# EAGLE board manual_shieldMine1 (EAGLE 9.2.0)
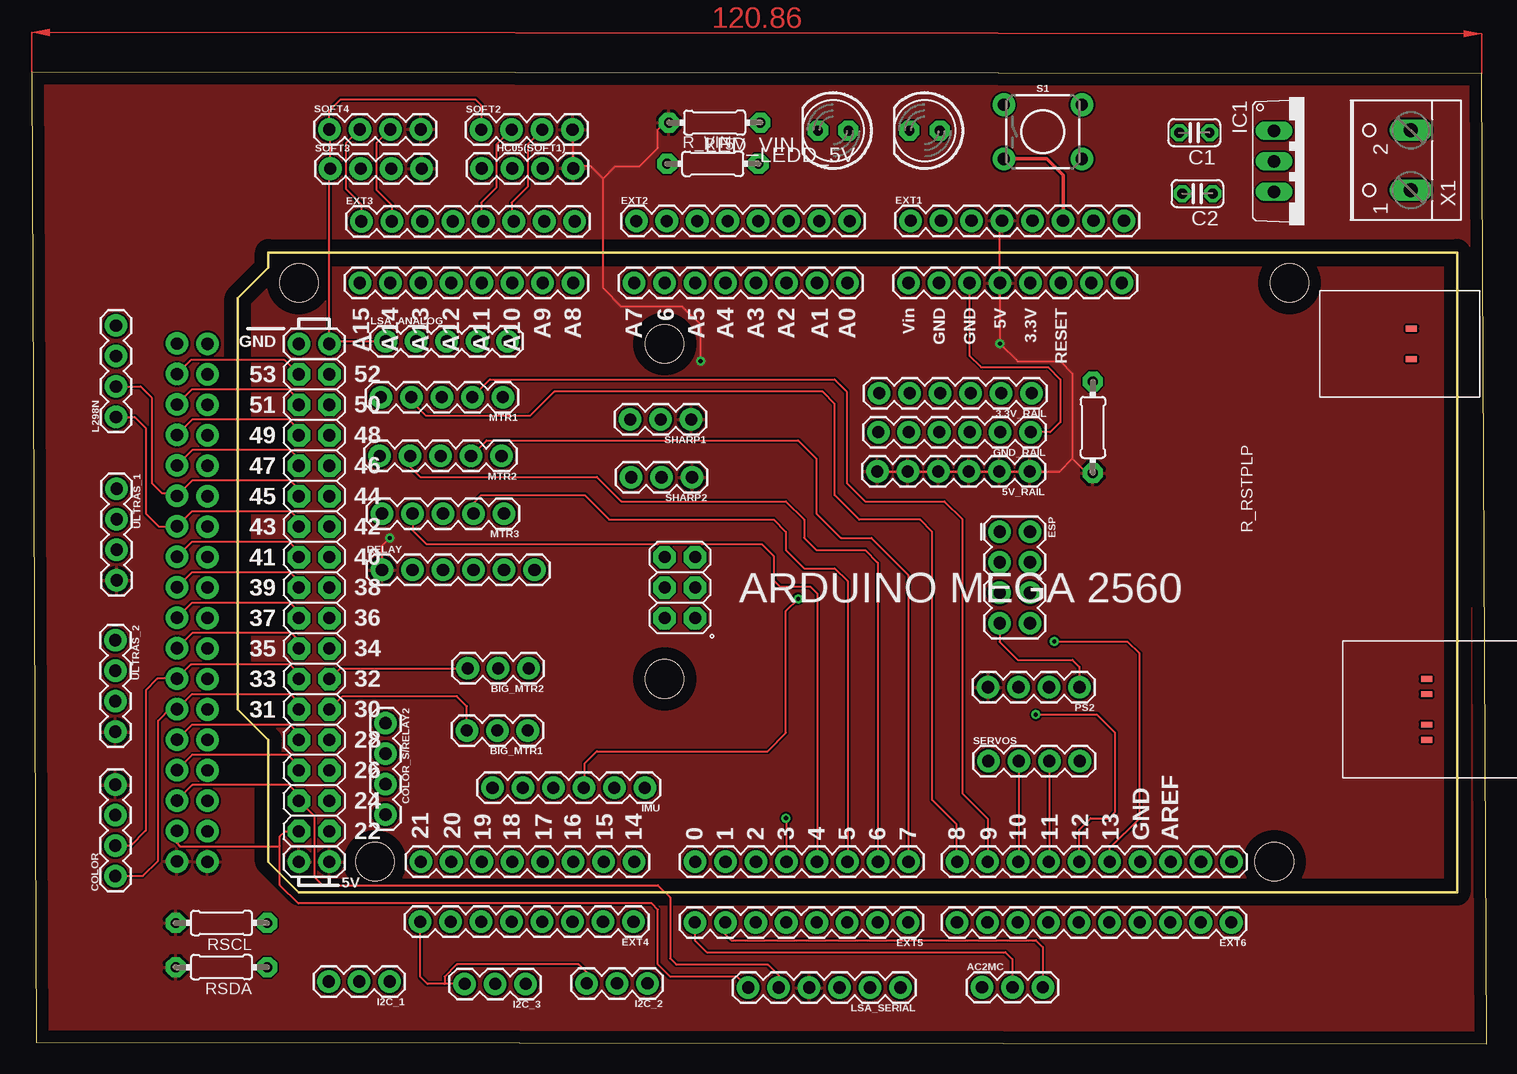
[diagram p0: board, top side]
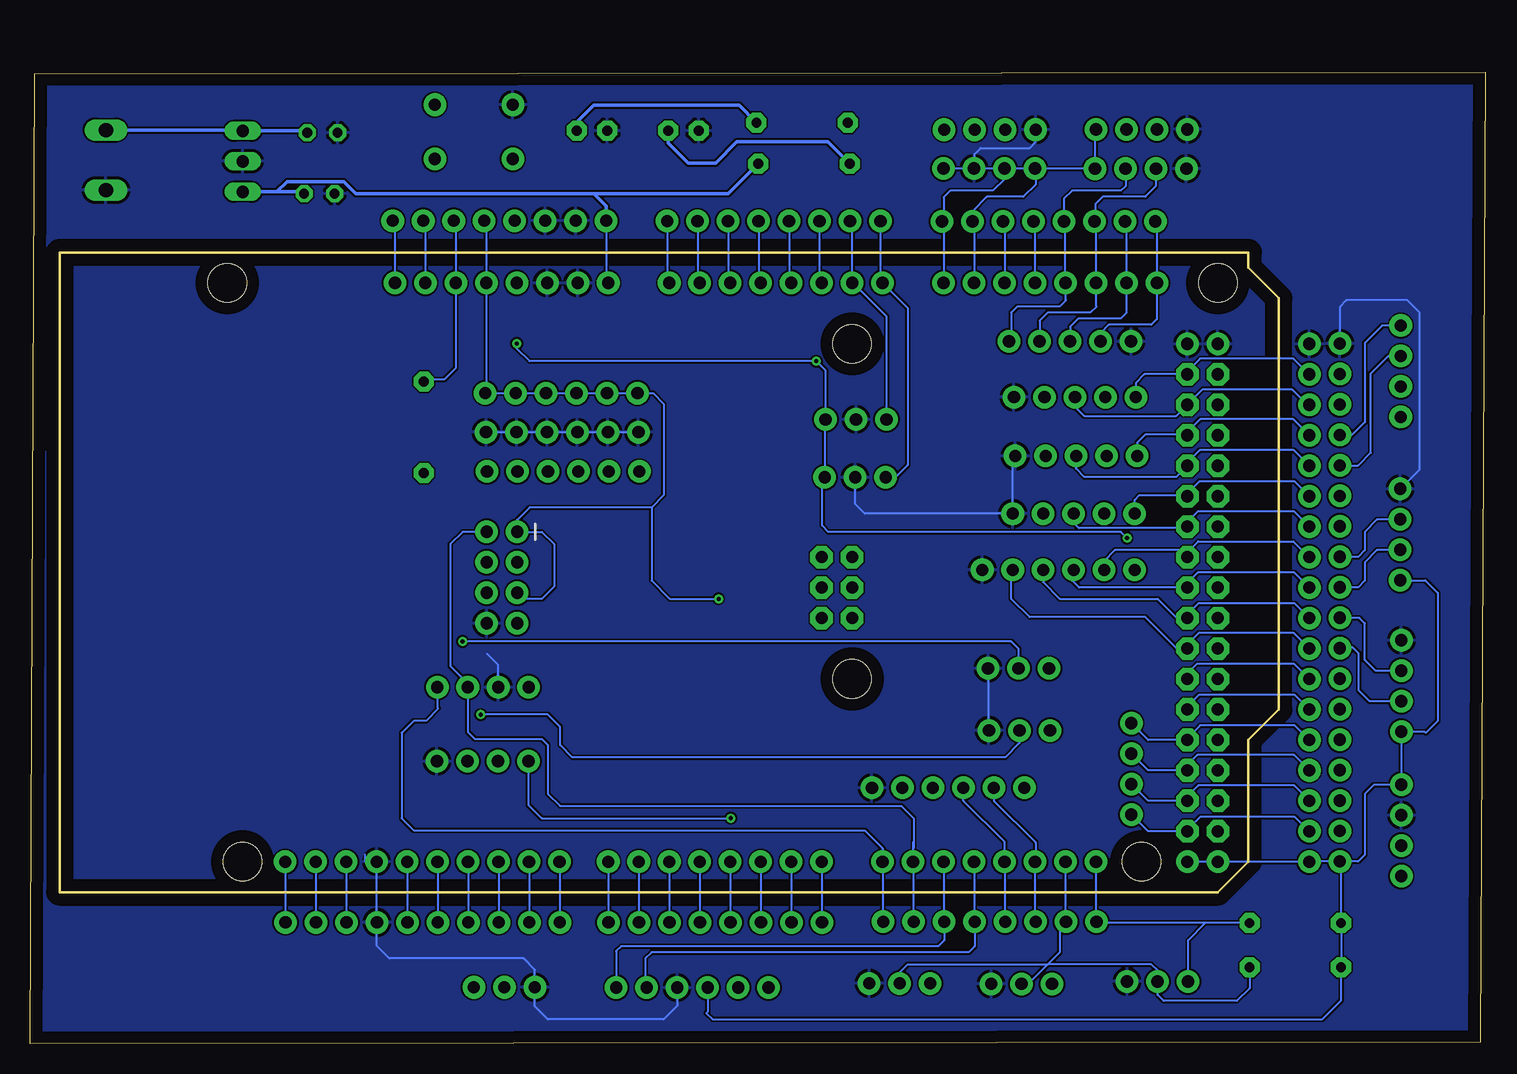
[diagram p1: board, bottom side, seen from below]

Size 121.27 x 80.98 mm. Coordinates in mm from the lower left corner, seen from the top.
Outline: 0.41,0.1 121.27,0 120.86,80.87 0,80.97 0.41,0.1
Copper layers (1*16): Top 0.035mm / dielectric 1.5mm / Bottom 0.035mm
Design rules "default": minimum track width 6mil, minimum drill 0.35mm, track to track 6mil, track to pad 6mil, pad to pad 6mil, via to via 6mil, smd to smd 6mil, copper to edge 40mil, drill to drill 6mil, minimum pad ring 10mil, minimum via ring 8mil, stop-mask expansion 4mil, vias tented up to drill 0mil, thermal gap 10mil

## Footprints (pad centres in the part's own frame; a part is rotated, then mirrored left to right if it is on the bottom)
1X06 = drill 1.016 pad 1.88: 1 0,0; 2 2.54,0; 3 5.08,0; 4 7.62,0; 5 10.16,0; 6 12.7,0
1X03 = drill 1.016 pad 1.88: 1 0,0; 2 2.54,0; 3 5.08,0
C025-024X044 = drill 0.813 pad 1.422 octagon: 1 -1.27,0; 2 1.27,0
1X04 = drill 1.016 pad 1.88: 1 0,0; 2 2.54,0; 3 5.08,0; 4 7.62,0
2X4 = drill 1.016 pad 1.88: 1 -3.81,-1.27; 2 -3.81,1.27; 3 -1.27,-1.27; 4 -1.27,1.27; 5 1.27,-1.27; 6 1.27,1.27; 7 3.81,-1.27; 8 3.81,1.27
1X08 = drill 1.016 pad 1.88: 1 0,0; 2 2.54,0; 3 5.08,0; 4 7.62,0; 5 10.16,0; 6 12.7,0; 7 15.24,0; 8 17.78,0
1X10 = drill 1.016 pad 1.88: 1 0,0; 2 2.54,0; 3 5.08,0; 4 7.62,0; 5 10.16,0; 6 12.7,0; 7 15.24,0; 8 17.78,0; 9 20.32,0; 10 22.86,0
1X18_NO_SILK = drill 1.016 pad 1.88: 1 0,0; 2 2.54,0; 3 5.08,0; 4 7.62,0; 5 10.16,0; 6 12.7,0; 7 15.24,0; 8 17.78,0; 9 20.32,0; 10 22.86,0; 11 25.4,0; 12 27.94,0; 13 30.48,0; 14 33.02,0; 15 35.56,0; 16 38.1,0; 17 40.64,0; 18 43.18,0
TO220V = drill 1.016 long: 1 -2.54,-2.54; 2 0,-2.54; 3 2.54,-2.54
LED5MM = drill 0.813 pad 1.676 octagon: A -1.27,0; K 1.27,0
1X05 = drill 1.016 pad 1.88: 1 0,0; 2 2.54,0; 3 5.08,0; 4 7.62,0; 5 10.16,0
ARDUINO_MEGA2560 = drill 1.016 pad 1.88: 0 63.5,50.8; 1 60.96,50.8; 2 58.42,50.8; 3 55.88,50.8; 3.3V 35.56,2.54; 4 53.34,50.8; 5 50.8,50.8; 5V 38.1,2.54; 5V. 93.98,50.8; 5V.. 96.52,50.8; 6 48.26,50.8; 7 45.72,50.8; 8 41.656,50.8; 9 39.116,50.8; 10 36.576,50.8; 11 34.036,50.8; 12 31.496,50.8; 13 28.956,50.8; 14 68.58,50.8; 15 71.12,50.8; 16 73.66,50.8; 17 76.2,50.8; 18 78.74,50.8; 19 81.28,50.8; 20 83.82,50.8; 21 86.36,50.8; A0 50.8,2.54; A1 53.34,2.54; A2 55.88,2.54; A3 58.42,2.54; A4 60.96,2.54; A5 63.5,2.54; A6 66.04,2.54; A7 68.58,2.54; A8 73.66,2.54; A9 76.2,2.54; A10 78.74,2.54; A11 81.28,2.54; A12 83.82,2.54; A13 86.36,2.54; A14 88.9,2.54; A15 91.44,2.54; AREF 23.876,50.8; GND 26.416,50.8; GND. 43.18,2.54; GND.. 40.64,2.54; GND... 93.98,7.62; GND.... 96.52,7.62; I/OREF 30.48,2.54; N/C 27.94,2.54; RESET 33.02,2.54; SCL1 18.796,50.8; SDA1 21.336,50.8; VIN 45.72,2.54 | drill 1.016 pad 1.88 octagon: 22 93.98,48.26; 23 96.52,48.26; 24 93.98,45.72; 25 96.52,45.72; 26 93.98,43.18; 27 96.52,43.18; 28 93.98,40.64; 29 96.52,40.64; 30 93.98,38.1; 31 96.52,38.1; 32 93.98,35.56; 33 96.52,35.56; 34 93.98,33.02; 35 96.52,33.02; 36 93.98,30.48; 37 96.52,30.48; 38 93.98,27.94; 39 96.52,27.94; 40 93.98,25.4; 41 96.52,25.4; 42 93.98,22.86; 43 96.52,22.86; 44 93.98,20.32; 45 96.52,20.32; 46 93.98,17.78; 47 96.52,17.78; 48 93.98,15.24; 49 96.52,15.24; 50 93.98,12.7; 51 96.52,12.7; 52 93.98,10.16; 53 96.52,10.16; +5V_ 66.04,30.48; GND__ 66.04,25.4; MISO 63.5,30.48; MOSI 66.04,27.94; RESET. 63.5,25.4; SCK 63.5,27.94 | smd 1.016 x 0.508: <PWR>+V 3.81,8.89; <PWR>-V 3.81,6.35; <USB>+V 2.54,40.64; <USB>D+ 2.54,39.37; <USB>D- 2.54,36.83; <USB>GND 2.54,35.56 | hole 3.2: 15.24,50.8; 13.97,2.54; 66.04,35.56; 66.04,7.62; 90.17,50.8; 96.52,2.54
0204/7 = drill 0.813 pad 1.676 octagon: 1 -3.81,0; 2 3.81,0
TACTILE_SWITCH_PTH_6.0MM = drill 1.016 pad 1.88: 1 -3.251,2.261; 2 3.251,2.261; 3 -3.251,-2.261; 4 3.251,-2.261
W237-102 = drill 1.194 long: 1 -2.5,-1.27; 2 2.5,-1.27

## Placement (x,y rotation side)
3.3V_RAIL  [1X06]  83.34,54.23 180 top
5V_RAIL  [1X06]  83.19,47.7 180 top
AC2MC  455-1750-1-ND  [1X03]  79.2,4.7 0 top
BIG_MTR1  455-1750-1-ND  [1X03]  41.35,26.11 180 top
BIG_MTR2  455-1750-1-ND  [1X03]  41.43,31.29 180 top
C1  [C025-024X044]  96.9,75.95 180 top
C2  [C025-024X044]  97.16,70.87 180 top
COLOR  [1X04]  6.98,13.97 90 top
COLOR_S/RELAY2  [1X04]  29.49,26.72 270 top
ESP  [2X4]  81.94,38.86 270 top
EXT1  [1X08]  73.25,68.61 0 top
EXT2  [1X08]  50.39,68.58 0 top
EXT3  [1X08]  27.48,68.55 0 top
EXT4  [1X08]  50.16,10.16 180 top
EXT5  [1X08]  73.05,10.11 180 top
EXT6  [1X10]  99.97,10.11 180 top
EXT_B1  [1X18_NO_SILK]  14.66,58.34 270 bottom
EXT_B2  [1X18_NO_SILK]  12.12,15.19 90 bottom
GND_RAIL  [1X06]  83.26,50.98 180 top
HC05(SOFT1)  [1X04]  37.52,72.97 0 top
I2C_1  455-1750-1-ND  [1X03]  29.84,5.18 180 top
I2C_2  455-1750-1-ND  [1X03]  51.33,5.03 180 top
I2C_3  455-1750-1-ND  [1X03]  41.17,4.98 180 top
IC1  7812TV  [TO220V]  106.07,73.56 270 top
IMU  [1X06]  51.1,21.34 180 top
L298N  [1X04]  7.04,52.25 90 top
LED_VIN  [LED5MM]  66.8,76.12 180 top
LEDD_5V  [LED5MM]  74.42,76.12 180 top
LSA_ANALOG  [1X05]  29.51,58.55 0 top
LSA_SERIAL  [1X06]  72.42,4.67 180 top
MTR1  [1X05]  39.27,53.9 180 top
MTR2  [1X05]  39.17,49 180 top
MTR3  [1X05]  39.37,44.2 180 top
PCB1  ARDUINO_MEGA2560  [ARDUINO_MEGA2560]  118.8,65.96 180 top
PS2  [1X04]  87.33,29.72 180 top
R_5V  [0204/7]  56.92,76.78 180 top
R_RSTPLP  [0204/7]  88.44,51.38 270 top
R_VIN  [0204/7]  56.77,73.36 0 top
RELAY  [1X06]  29.21,39.5 0 top
RSCL  [0204/7]  15.82,10.06 180 top
RSDA  [0204/7]  15.82,6.38 180 top
S1  MOMENTARY-SWITCH-SPST-PTH-6.0MM  [TACTILE_SWITCH_PTH_6.0MM]  84.28,76.02 0 top
SERVOS  [1X04]  79.73,23.55 0 top
SHARP1  455-1750-1-ND  [1X03]  54.97,52.04 180 top
SHARP2  455-1750-1-ND  [1X03]  55.04,47.22 180 top
SOFT2  [1X04]  37.46,76.2 0 top
SOFT3  [1X04]  24.89,72.95 0 top
SOFT4  [1X04]  24.82,76.23 0 top
ULTRAS_1  [1X04]  7.09,46.25 270 top
ULTRAS_2  [1X04]  6.98,33.63 270 top
X1  [W237-102]  113.66,73.66 90 top

## Library data of the parts
3.3V_RAIL 5V_RAIL GND_RAIL IMU LSA_SERIAL RELAY = SparkFun-Connectors; PROD_ID: CONN-08437
AC2MC BIG_MTR1 BIG_MTR2 I2C_1-I2C_3 SHARP1 SHARP2 = SparkFun-Connectors; PROD_ID: XXX-00000
C1 C2 LED_VIN LEDD_5V R_5V R_RSTPLP R_VIN RSCL RSDA = adafruit
COLOR COLOR_S/RELAY2 HC05(SOFT1) L298N PS2 SERVOS SOFT2-SOFT4 ULTRAS_1 ULTRAS_2 = SparkFun-Connectors; PROD_ID: CONN-09696
ESP EXT_B1 EXT_B2 LSA_ANALOG MTR1-MTR3 = SparkFun-Connectors
EXT1-EXT5 = SparkFun-Connectors; PROD_ID: CONN-08438
EXT6 = SparkFun-Connectors; PROD_ID: CONN-11563
IC1 = linear
PCB1 = E14_Arduino_revC
S1 = SparkFun-Switches; PROD_ID: SWCH-08441; SF_SKU: COM-00097
X1 = con-wago-500; MPN: 237-102; OC_FARNELL: unknown; OC_NEWARK: 70K9898

## Nets
2: EXT5.6 PCB1.2
3: EXT5.5 PCB1.3 SERVOS.1
3.3V: 3.3V_RAIL.1 3.3V_RAIL.2 3.3V_RAIL.3 3.3V_RAIL.4 3.3V_RAIL.5 3.3V_RAIL.6 ESP.1 ESP.5 EXT1.5 IMU.3 PCB1.3.3V
4: EXT5.4 MTR3.4 PCB1.4
5: EXT5.3 MTR3.2 PCB1.5
5V: 5V_RAIL.1 5V_RAIL.2 5V_RAIL.3 5V_RAIL.4 5V_RAIL.5 5V_RAIL.6 COLOR.4 EXT1.4 EXT_B1.18 EXT_B2.1 HC05(SOFT1).4 LSA_SERIAL.4 PCB1.5V PCB1.5V. PCB1.5V.. PS2.4 R_5V.2 R_RSTPLP.2 RELAY.1 RSCL.2 RSDA.2 SHARP1.1 SHARP2.1 SOFT2.4 SOFT3.4 SOFT4.4 ULTRAS_1.4 ULTRAS_2.4
6: EXT5.2 MTR2.4 PCB1.6
7: EXT5.1 MTR2.2 PCB1.7
8: EXT6.10 MTR1.4 PCB1.8
9: EXT6.9 MTR1.2 PCB1.9
10: EXT6.8 PCB1.10 SERVOS.2
11: EXT6.7 PCB1.11 SERVOS.3
12: BIG_MTR1.2 EXT6.6 PCB1.12
12V: C2.1 EXT1.1 IC1.3 PCB1.VIN R_VIN.2
13: BIG_MTR2.2 EXT6.5 PCB1.13
22: COLOR_S/RELAY2.4 EXT_B1.17 PCB1.22
23: EXT_B2.2 LSA_SERIAL.6 PCB1.23
24: COLOR_S/RELAY2.3 EXT_B1.16 PCB1.24
25: EXT_B2.3 LSA_SERIAL.5 PCB1.25
26: COLOR_S/RELAY2.2 EXT_B1.15 PCB1.26
27: EXT_B2.4 PCB1.27
28: COLOR_S/RELAY2.1 EXT_B1.14 PCB1.28
29: EXT_B2.5 PCB1.29
30: BIG_MTR1.3 EXT_B1.13 PCB1.30
31: COLOR.1 EXT_B2.6 PCB1.31
32: BIG_MTR2.3 EXT_B1.12 PCB1.32
33: COLOR.2 EXT_B2.7 PCB1.33
34: EXT_B1.11 PCB1.34 RELAY.5
35: EXT_B2.8 PCB1.35 ULTRAS_2.3
36: EXT_B1.10 PCB1.36 RELAY.4
37: EXT_B2.9 PCB1.37 ULTRAS_2.2
38: EXT_B1.9 PCB1.38 RELAY.3
39: EXT_B2.10 PCB1.39 ULTRAS_1.3
40: EXT_B1.8 PCB1.40 RELAY.2
41: EXT_B2.11 PCB1.41 ULTRAS_1.2
42: EXT_B1.7 MTR3.3 PCB1.42
43: EXT_B2.12 L298N.1 PCB1.43
44: EXT_B1.6 MTR3.5 PCB1.44
45: EXT_B2.13 L298N.2 PCB1.45
46: EXT_B1.5 MTR2.3 PCB1.46
47: EXT_B2.14 L298N.3 PCB1.47
48: EXT_B1.4 MTR2.5 PCB1.48
49: EXT_B2.15 L298N.4 PCB1.49
50: EXT_B1.3 MTR1.3 PCB1.50
51: EXT_B2.16 PCB1.51
52: EXT_B1.2 MTR1.5 PCB1.52
53: EXT_B2.17 PCB1.53
A0: EXT2.8 PCB1.A0
A1: EXT2.7 PCB1.A1
A2: EXT2.6 PCB1.A2
A3: EXT2.5 PCB1.A3
A4: EXT2.4 PCB1.A4
A5: EXT2.3 PCB1.A5
A6: EXT2.2 PCB1.A6 SHARP1.3
A7: EXT2.1 PCB1.A7 SHARP2.3
A8: EXT3.8 HC05(SOFT1).2 PCB1.A8
A9: EXT3.7 HC05(SOFT1).1 PCB1.A9
A10: EXT3.6 PCB1.A10 SOFT2.3
A11: EXT3.5 PCB1.A11 SOFT2.2
A12: EXT3.4 LSA_ANALOG.5 PCB1.A12 SOFT3.3
A13: EXT3.3 LSA_ANALOG.4 PCB1.A13 SOFT3.2
A14: EXT3.2 LSA_ANALOG.3 PCB1.A14 SOFT4.3
A15: EXT3.1 LSA_ANALOG.2 PCB1.A15 SOFT4.2
AREF: EXT6.3 PCB1.AREF
GND: AC2MC.1 BIG_MTR1.1 BIG_MTR2.1 C1.2 C2.2 COLOR.3 ESP.8 EXT1.2 EXT1.3 EXT6.4 EXT_B1.1 EXT_B2.18 GND_RAIL.1 GND_RAIL.2 GND_RAIL.3 GND_RAIL.4 GND_RAIL.5 GND_RAIL.6 HC05(SOFT1).3 I2C_1.1 I2C_2.1 I2C_3.1 IC1.2 IMU.1 LED_VIN.K LEDD_5V.K LSA_ANALOG.1 LSA_SERIAL.3 MTR1.1 MTR2.1 MTR3.1 PCB1.GND PCB1.GND. PCB1.GND.. PCB1.GND... PCB1.GND.... PS2.3 RELAY.6 S1.1 SERVOS.4 SHARP1.2 SHARP2.2 SOFT2.1 SOFT3.1 SOFT4.1 ULTRAS_1.1 ULTRAS_2.1 X1.1
N$4: LED_VIN.A R_VIN.1
N$5: LEDD_5V.A R_5V.1
N$55: EXT1.6 PCB1.RESET R_RSTPLP.1 S1.3
N$61: EXT1.7 PCB1.I/OREF
N$62: EXT1.8 PCB1.N/C
RX0: AC2MC.2 EXT5.8 PCB1.0
RX1: EXT4.6 IMU.5 PCB1.19
RX2: EXT4.4 LSA_SERIAL.2 PCB1.17
RX3: ESP.2 EXT4.2 PCB1.15 PS2.2
SCL: EXT4.8 I2C_1.3 I2C_2.3 I2C_3.3 PCB1.21 RSCL.1
SCL1: EXT6.1 PCB1.SCL1
SDA: EXT4.7 I2C_1.2 I2C_2.2 I2C_3.2 PCB1.20 RSDA.1
SDA1: EXT6.2 PCB1.SDA1
TX0: AC2MC.3 EXT5.7 PCB1.1
TX1: EXT4.5 IMU.4 PCB1.18
TX2: EXT4.3 LSA_SERIAL.1 PCB1.16
TX3: ESP.7 EXT4.1 PCB1.14 PS2.1
V_SUP: C1.1 IC1.1 X1.2

## Tracks (layer width: path | path; a pad name or v marks a point on that pad's centre or on a via)
2
  Bottom 0.152: PCB1.2 60.38,10.13 EXT5.6
3  (via drill 0.35)
  Top 0.152: PCB1.3 62.92,18.74 v62.87,18.8
  Bottom 0.152: PCB1.3 62.92,10.13 EXT5.5 | SERVOS.1 79.73,19.91 78.61,18.8 v62.87,18.8
3.3V  (via drill 0.35)
  Top 0.152: v63.88,37.08 62.87,36.07 62.87,25.91 61.34,24.38 47.12,24.38 46.1,23.37 46.1,21.41 IMU.3
  Bottom 0.152: EXT1.5 83.24,68.43 PCB1.3.3V 83.24,54.33 3.3V_RAIL.1 3.3V_RAIL.2 3.3V_RAIL.3 3.3V_RAIL.4 3.3V_RAIL.5 3.3V_RAIL.6 69.34,54.23 68.45,53.34 68.45,45.72 69.47,44.7 | 69.47,44.7 79.63,44.7 80.67,43.66 ESP.1 78.61,42.67 77.6,41.66 77.6,38.1 78.61,37.08 80.65,37.08 80.67,37.11 ESP.5 | 69.47,44.7 69.47,38.61 67.94,37.08 v63.88,37.08
4
  Top 0.152: MTR3.4 31.75,42.8 32.89,41.66 52.2,41.66 52.27,41.73 55.78,41.73 55.86,41.66 60.83,41.66 61.85,40.64 61.85,38.61 62.36,38.1 64.9,38.1 65.46,37.54 PCB1.4
  Bottom 0.152: PCB1.4 65.46,10.13 EXT5.4
5
  Top 0.152: MTR3.2 36.83,45.09 37.46,45.72 46.1,45.72 48.13,43.69 61.85,43.69 62.87,42.67 62.87,41.15 64.39,39.62 66.93,39.62 68,38.56 PCB1.5
  Bottom 0.152: PCB1.5 68,10.13 EXT5.3
5V  (via drill 0.35)
  Top 0.152: 81.15,69.09 80.7,68.63 PCB1.5V v80.7,58.37 82.17,56.9 85.72,56.9 86.74,55.88 86.74,48.77 | 86.74,48.77 87.94,47.57 R_RSTPLP.2 | 86.74,48.77 85.67,47.7 5V_RAIL.1 5V_RAIL.6 | v55.75,56.9 55.75,59.94 54.23,61.47 49.15,61.47 47.62,62.99 47.62,72.14 | 47.62,72.14 46.61,73.15 45.31,73.15 HC05(SOFT1).4 45.14,76.15 SOFT2.4 | 47.62,72.14 48.64,73.15 50.67,73.15 52.2,74.68 52.2,76.2 52.78,76.78 R_5V.2 | RELAY.1 29.21,41.53 v29.84,42.16
  Bottom 0.152: 55.04,47.75 55.04,51.97 SHARP1.1 54.97,56.11 v55.75,56.9 79.63,56.9 80.7,57.96 v80.7,58.37 | 55.04,47.75 SHARP2.1 | HC05(SOFT1).4 45.11,72.95 SOFT3.4 32.51,76.15 SOFT4.4 | EXT_B2.1 14.63,15.19 EXT_B1.18 PCB1.5V.. PCB1.5V. | EXT_B2.1 10.59,15.19 10.03,15.75 10.03,20.83 9.27,21.59 COLOR.4 ULTRAS_2.4 5.05,26.01 4.95,25.91 3.94,26.92 3.94,37.59 4.98,38.63 ULTRAS_1.4 | v29.84,42.16 30.35,42.67 54.74,42.67 55.24,43.18 55.24,47.55 55.04,47.75 | LSA_SERIAL.4 64.79,2.64 64.9,2.54 64.39,2.03 13.59,2.03 12.01,3.61 RSDA.2 RSCL.2 12.01,15.09 EXT_B2.1
  pour Top: 128.91,27.94 128.91,83.82 -8.26,83.82 -8.26,-2.54 128.91,-2.54
6
  Top 0.152: MTR2.4 31.55,48.08 32.38,47.24 47.12,47.24 49.15,45.21 62.87,45.21 64.39,43.69 64.39,42.16 65.41,41.15 69.47,41.15 70.54,40.08 PCB1.6
  Bottom 0.152: PCB1.6 70.54,10.13 EXT5.2
7
  Top 0.152: MTR2.2 37.92,50.29 63.88,50.29 65.41,48.77 65.41,44.2 67.44,42.16 69.98,42.16 73.08,39.06 PCB1.7
  Bottom 0.152: EXT5.1 73.05,15.14 PCB1.7
8
  Top 0.152: PCB1.8 77.09,15.21 77.09,18.29 75.06,20.32 75.06,42.67 74.04,43.69 68.96,43.69 66.93,45.72 66.93,53.34 65.91,54.36 43.56,54.36 41.53,52.32 32.89,52.32 31.65,53.57 MTR1.4
  Bottom 0.152: PCB1.8 77.14,10.13 EXT6.10
9
  Top 0.152: MTR1.2 38.2,55.37 66.93,55.37 67.94,54.36 67.94,46.74 69.47,45.21 76.07,45.21 77.6,43.69 77.6,20.83 79.68,18.74 PCB1.9
  Bottom 0.152: PCB1.9 79.68,10.13 EXT6.9
10
  Top 0.152: SERVOS.2 82.27,15.21 PCB1.10
  Bottom 0.152: PCB1.10 82.22,10.13 EXT6.8
11
  Top 0.152: SERVOS.3 84.81,15.21 PCB1.11
  Bottom 0.152: PCB1.11 84.76,10.13 EXT6.7
12  (via drill 0.35)
  Top 0.152: v83.69,27.43 88.77,27.43 90.3,25.91 90.3,19.3 89.79,18.8 88.27,18.8 87.3,17.83 PCB1.12
  Bottom 0.152: PCB1.12 87.3,10.13 EXT6.6 | BIG_MTR1.2 38.81,25.07 40.01,23.88 76.07,23.88 77.09,24.89 77.09,26.42 78.11,27.43 v83.69,27.43
12V
  Bottom 0.152: EXT1.1 73.25,63.6 PCB1.VIN
  Bottom 0.305: IC1.3 100.71,71.02 | 100.71,71.02 98.58,71.02 C2.1 | EXT1.1 73.25,69.82 74.3,70.87 | 74.3,70.87 94.11,70.87 95.12,71.88 99.85,71.88 100.71,71.02 | R_VIN.2 63.07,70.87 74.3,70.87
13  (via drill 0.35)
  Top 0.152: v85.22,33.53 91.31,33.53 92.33,32.51 92.33,18.8 89.84,16.31 PCB1.13
  Bottom 0.152: PCB1.13 89.84,10.13 EXT6.5 | BIG_MTR2.2 38.89,32.92 39.5,33.53 v85.22,33.53
22
  Bottom 0.152: EXT_B1.17 15.87,18.92 23.72,18.92 24.82,17.83 PCB1.22 28.09,17.7 COLOR_S/RELAY2.4
23
  Top 0.152: LSA_SERIAL.6 58.8,5.59 53.21,5.59 52.2,6.6 52.2,11.18 51.69,11.68 22.23,11.68 20.7,13.21 20.7,16.48 | 20.7,16.48 20.7,17.27 21.13,17.7 PCB1.23 | EXT_B2.2 12.12,16.81 12.07,16.76 12.37,16.46 20.68,16.46 20.7,16.48
24
  Bottom 0.152: EXT_B1.16 15.93,21.51 23.9,21.51 24.82,20.6 PCB1.24 28.09,20.24 COLOR_S/RELAY2.3
25
  Top 0.152: EXT_B2.3 13.41,21.56 21.44,21.56 22.28,20.73 PCB1.25 23.55,18.97 23.55,13.92 24.26,13.21 52.2,13.21 53.21,12.19 53.21,7.11 53.72,6.6 61.34,6.6 62.26,5.69 LSA_SERIAL.5
26
  Bottom 0.152: EXT_B1.15 15.93,24.05 23.98,24.05 24.82,23.22 PCB1.26 28.09,22.78 COLOR_S/RELAY2.2
27
  Top 0.152: PCB1.27 22.28,23.16 21.36,24.08 13.39,24.08 EXT_B2.4
28
  Bottom 0.152: EXT_B1.14 15.87,26.54 23.75,26.54 24.82,25.48 PCB1.28 28.09,25.32 COLOR_S/RELAY2.1
29
  Top 0.152: PCB1.29 22.28,25.86 21.54,26.59 13.36,26.59 EXT_B2.5
30
  Top 0.152: PCB1.30 25.91,28.96 35.43,28.96 36.27,28.12 BIG_MTR1.3
  Bottom 0.152: EXT_B1.13 15.85,29.06 23.88,29.06 24.82,28.12 PCB1.30
31
  Top 0.152: PCB1.31 22.28,28.45 21.59,29.13 13.36,29.13 EXT_B2.6 11.51,27.89 10.54,26.92 10.54,15.24 9.27,13.97 COLOR.1
32
  Top 0.152: PCB1.32 25.71,31.29 BIG_MTR2.3
  Bottom 0.152: EXT_B1.12 15.9,31.65 24.05,31.65 24.82,30.89 PCB1.32
33
  Top 0.152: PCB1.33 22.28,30.84 21.51,31.6 13.28,31.6 EXT_B2.7 10.49,30.43 9.52,29.46 9.52,17.78 8.25,16.51 COLOR.2
34
  Bottom 0.152: EXT_B1.11 15.95,34.24 23.88,34.24 24.82,33.3 PCB1.34 25.71,32.94 28.32,35.56 37.97,35.56 39.5,37.08 39.5,39.37 RELAY.5
35
  Top 0.152: PCB1.35 22.28,33.6 21.64,34.24 13.39,34.24 EXT_B2.8
  Bottom 0.152: ULTRAS_2.3 9.63,28.55 10.54,29.46 10.54,32.51 11.05,33.02 12.07,33.02 EXT_B2.8
36
  Bottom 0.152: EXT_B1.10 15.87,36.7 23.9,36.7 24.82,35.79 24.82,35.56 | 24.82,35.56 PCB1.36 | RELAY.4 36.83,38.48 35.43,37.08 27.3,37.08 25.78,35.56 24.82,35.56
37
  Top 0.152: PCB1.37 22.28,35.99 21.54,36.73 13.34,36.73 EXT_B2.9
  Bottom 0.152: ULTRAS_2.2 9.12,31.09 10.03,32 10.03,35.05 10.49,35.51 EXT_B2.9
38
  Bottom 0.152: EXT_B1.9 15.9,39.27 23.95,39.27 24.82,38.4 PCB1.38 33.83,38.02 34.42,38.61 34.29,38.73 RELAY.3
39
  Top 0.152: PCB1.39 22.28,38.56 21.57,39.27 13.34,39.27 EXT_B2.10
  Bottom 0.152: ULTRAS_1.3 7.11,41.15 9.02,41.15 10.03,40.13 10.03,38.61 10.59,38.05 EXT_B2.10
40
  Bottom 0.152: EXT_B1.8 15.98,41.88 23.93,41.88 24.82,41 PCB1.40 25.4,41.15 30.86,41.15 31.75,40.26 RELAY.2
41
  Top 0.152: PCB1.41 22.28,41.05 21.49,41.83 13.36,41.83 EXT_B2.11
  Bottom 0.152: ULTRAS_1.2 7.11,43.69 9.02,43.69 10.03,42.67 10.03,41.15 10.59,40.59 EXT_B2.11
42
  Bottom 0.152: EXT_B1.7 15.93,44.37 23.95,44.37 24.82,43.51 PCB1.42 24.94,42.98 33.86,42.98 34.29,43.41 MTR3.3
43
  Top 0.152: PCB1.43 22.28,43.69 21.59,44.37 13.36,44.37 EXT_B2.12 10.59,43.13 9.52,44.2 9.52,51.31 8.59,52.25 L298N.1
44
  Bottom 0.152: PCB1.44 24.82,45.72 | 24.82,45.72 24.82,45.85 23.77,46.89 15.9,46.89 EXT_B1.6 | MTR3.5 29.21,45.34 28.83,45.72 24.82,45.72
45
  Top 0.152: PCB1.45 22.28,46.23 21.57,46.94 13.39,46.94 12.37,45.92 | 12.37,45.92 EXT_B2.13 | L298N.2 9.09,54.79 10.03,53.85 10.03,46.74 10.85,45.92 12.37,45.92
46
  Bottom 0.152: EXT_B1.5 15.95,49.48 23.77,49.48 24.82,48.44 PCB1.46 25.76,47.24 33.4,47.24 34.09,47.93 MTR2.3
47
  Top 0.152: PCB1.47 22.28,48.77 21.57,49.48 13.39,49.48 EXT_B2.14
  Bottom 0.152: EXT_B2.14 10.59,48.21 9.52,49.28 9.52,55.88 8.08,57.33 L298N.3
48
  Bottom 0.152: EXT_B1.4 16,52.07 23.72,52.07 24.82,50.98 PCB1.48 24.89,50.8 28.32,50.8 29.01,50.11 MTR2.5
49
  Top 0.152: PCB1.49 22.28,51.18 21.41,52.04 13.41,52.04 EXT_B2.15
  Bottom 0.152: L298N.4 8.59,59.87 10.03,58.42 10.03,51.82 11.1,50.75 EXT_B2.15
50
  Bottom 0.152: EXT_B1.3 14.81,53.26 16.1,54.56 23.52,54.56 24.75,53.33 PCB1.50 25.76,52.32 33.4,52.32 34.19,53.11 MTR1.3
51
  Top 0.152: PCB1.51 22.28,53.67 21.41,54.53 13.36,54.53 EXT_B2.16
52
  Bottom 0.152: EXT_B1.2 15.98,57.12 23.75,57.12 24.82,56.06 PCB1.52 28.4,55.8 29.11,55.09 MTR1.5
53
  Top 0.152: EXT_B2.17 13.31,57.02 21.06,57.02 PCB1.53
A0
  Bottom 0.152: EXT2.8 68.17,63.6 PCB1.A0
A1
  Bottom 0.152: EXT2.7 65.63,63.6 PCB1.A1
A2
  Bottom 0.152: EXT2.6 63.09,63.6 PCB1.A2
A3
  Bottom 0.152: EXT2.5 60.55,63.6 PCB1.A3
A4
  Bottom 0.152: EXT2.4 58.01,63.6 PCB1.A4
A5
  Bottom 0.152: EXT2.3 55.47,63.6 PCB1.A5
A6
  Bottom 0.152: PCB1.A6 52.76,63.5 | 52.76,63.5 52.76,68.4 EXT2.2 | SHARP1.3 49.89,60.63 52.76,63.5
A7
  Bottom 0.152: EXT2.1 50.39,63.6 PCB1.A7 48.13,61.34 48.13,48.26 49.17,47.22 SHARP2.3
A8
  Bottom 0.152: EXT3.8 45.14,68.43 | 45.14,68.43 45.14,68.07 PCB1.A8 | HC05(SOFT1).2 40.06,72.09 41.02,71.12 44.58,71.12 45.14,70.56 45.14,68.43
A9
  Bottom 0.152: PCB1.A9 42.6,68.43 EXT3.7 42.72,69.42 41.53,70.61 38.48,70.61 37.46,71.63 37.46,72.14 37.52,72.19 HC05(SOFT1).1
A10
  Top 0.152: SOFT2.3 41.35,75.01 41.35,71.45 40.01,70.1 40.01,68.73 EXT3.6
  Bottom 0.152: EXT3.6 40.06,68.43 PCB1.A10
A11
  Top 0.152: EXT3.5 37.46,68.73 37.46,70.1 38.73,71.37 38.73,74.93 SOFT2.2
  Bottom 0.152: EXT3.5 37.52,68.43 PCB1.A11
A12
  Bottom 0.152: SOFT3.3 29.97,71.5 30.35,71.12 34.42,71.12 35.1,70.43 35.1,68.58 | 35.1,68.58 EXT3.4 | LSA_ANALOG.5 39.5,58.73 39.5,60.96 38.99,61.47 35.43,61.47 34.93,61.98 34.98,62.03 PCB1.A12 34.98,68.45 35.1,68.58
A13
  Bottom 0.152: EXT3.3 32.49,68.48 | 32.49,68.48 32.44,68.43 PCB1.A13 32.44,61.52 32.38,61.47 32.89,60.96 36.45,60.96 37.13,60.27 LSA_ANALOG.4 | SOFT3.2 27.43,71.5 28.32,70.61 31.88,70.61 32.49,70 32.49,68.48
A14
  Top 0.152: SOFT4.3 28.73,75.06 28.73,71.2 30.02,69.9 EXT3.2
  Bottom 0.152: EXT3.2 29.9,68.43 PCB1.A14 29.9,60.91 30.35,60.45 33.91,60.45 34.59,59.77 LSA_ANALOG.3
A15
  Top 0.152: SOFT4.2 26.19,75.06 26.19,71.27 27.48,69.98 EXT3.1
  Bottom 0.152: EXT3.1 27.36,68.43 PCB1.A15 27.36,60.4 27.81,59.94 31.37,59.94 32.05,59.26 LSA_ANALOG.2
AREF
  Bottom 0.152: PCB1.AREF 94.92,10.13 EXT6.3
GND
  Top 0.152: PCB1.GND.. 78.16,57.35 79.12,56.39 84.71,56.39 85.72,55.37 85.72,51.82 84.89,50.98 GND_RAIL.1 | LSA_ANALOG.1 25.02,58.55 PCB1.GND... 24.82,72.87 SOFT3.1 24.89,76.15 SOFT4.1 24.82,77.78 25.78,78.74 36.96,78.74 37.46,78.23 SOFT2.1
  Bottom 0.152: 93.34,15.75 93.34,15.24 92.35,14.25 EXT6.4 92.35,8.15 91.31,7.11 80.14,7.11 79.2,6.17 AC2MC.1 79.2,3.12 78.11,2.03 68.45,2.03 67.34,3.15 LSA_SERIAL.3 | SHARP2.2 52.5,45.01 51.69,44.2 MTR3.1 39.37,48.79 MTR2.1 | BIG_MTR1.1 41.35,31.22 BIG_MTR2.1 | GND_RAIL.1 GND_RAIL.2 GND_RAIL.3 GND_RAIL.4 GND_RAIL.5 GND_RAIL.6 | HC05(SOFT1).3 42.54,73.03 42.54,74.17 42.04,74.68 37.97,74.68 37.46,75.18 SOFT2.1 | ULTRAS_1.1 5.46,47.88 5.46,60.96 6.48,61.98 11.56,61.98 12.12,61.42 EXT_B2.18 | PS2.3 82.25,31.57 83.19,32.51
  pour Bottom: 131.44,25.4 131.44,86.36 128.91,86.36 -10.8,86.36 -10.8,-5.08 131.44,-5.08
N$4
  Bottom 0.305: R_VIN.1 54.79,75.18 62.36,75.18 64.13,73.41 66.42,73.41 68.07,75.06 LED_VIN.A
N$5
  Bottom 0.305: R_5V.1 62.18,78.23 74.3,78.23 75.69,76.84 LEDD_5V.A
N$55
  Top 0.305: S1.3 84.61,73.76 85.98,72.39 85.98,68.63 EXT1.6
  Bottom 0.152: EXT1.6 85.78,68.43 PCB1.RESET 85.78,56.34 86.74,55.37 88.44,55.37 R_RSTPLP.1
N$61
  Bottom 0.152: EXT1.7 88.32,68.43 PCB1.I/OREF
N$62
  Bottom 0.152: EXT1.8 90.86,68.43 PCB1.N/C
RX0
  Top 0.152: EXT5.8 55.27,8.61 56.26,7.62 81.15,7.62 81.74,7.04 AC2MC.2
  Bottom 0.152: PCB1.0 55.3,10.13 EXT5.8
RX1
  Bottom 0.152: EXT4.6 37.52,10.21 PCB1.19 37.46,15.21 37.46,16.76 40.95,20.24 IMU.5
RX2
  Bottom 0.152: PCB1.17 42.6,10.21 EXT4.4 42.54,8.13 43.05,7.62 69.47,7.62 69.98,7.11 69.98,4.77 LSA_SERIAL.2
RX3
  Bottom 0.152: EXT4.2 47.68,10.21 PCB1.15 47.68,16.26 | 47.68,16.26 47.68,16.81 | ESP.2 85.22,42.67 86.23,41.66 86.23,31.5 84.78,30.05 PS2.2 84.78,25.98 84.2,25.4 78.61,25.4 78.11,24.89 78.11,20.83 77.09,19.81 48.64,19.81 47.62,18.8 47.62,16.31 47.68,16.26
SCL
  Top 0.152: I2C_3.3 34.42,4.98 | 34.42,4.98 32.99,4.98 32.38,5.59 EXT4.8 | I2C_2.3 46.25,5.94 45.59,6.6 35.43,6.6 34.42,5.59 34.42,4.98
  Bottom 0.152: PCB1.21 32.44,10.21 EXT4.8 32.28,10.06 23.34,10.06 | RSCL.1 23.34,10.06 | I2C_1.3 24.76,8.64 23.34,10.06
SCL1
  Bottom 0.152: PCB1.SCL1 100,10.13 EXT6.1
SDA
  Bottom 0.152: RSDA.1 19.63,4.62 20.7,3.56 26.8,3.56 27.3,4.06 I2C_1.2 27.3,6.1 27.81,6.6 36.45,6.6 | 36.45,6.6 48.13,6.6 48.79,5.94 I2C_2.2 | 36.45,6.6 35.43,7.62 35.43,9.65 EXT4.7 34.98,10.21 PCB1.20 | I2C_3.2 38.07,4.98 36.45,6.6
SDA1
  Bottom 0.152: PCB1.SDA1 97.46,10.13 EXT6.2
TX0
  Top 0.152: EXT5.7 57.81,9.17 57.79,9.14 58.29,8.64 83.69,8.64 84.28,8.05 AC2MC.3
  Bottom 0.152: PCB1.1 57.84,10.13 EXT5.7
TX1
  Bottom 0.152: EXT4.5 40.06,10.21 PCB1.18 40.06,16.81 43.48,20.24 IMU.4
TX2
  Bottom 0.152: PCB1.16 45.14,10.21 EXT4.3 45.09,8.64 45.59,8.13 72.01,8.13 72.41,7.72 LSA_SERIAL.1
TX3
  Top 0.152: 80.65,35.03 ESP.7 80.67,33.5 82.17,32 86.74,32 87.33,31.42 PS2.1
  Bottom 0.152: EXT4.1 50.22,10.21 PCB1.14 50.22,16.2 50.16,16.26 51.69,17.78 89.28,17.78 90.3,18.8 90.3,25.91 89.28,26.92 88.27,26.92 87.25,27.94 87.33,28.02 PS2.1
V_SUP
  Bottom 0.305: X1.2 103.59,76.16 IC1.1 98.32,76.1 C1.1
(copper drawn outside any net)
  shapes: Top area x1